# Altium PCB Y9A-07-1517.PcbDoc
Units mil, origin at the board's own origin, x right, y up, seen from the top; angles counter-clockwise.
Board outline 6000 x 4000 mil, 2 copper layers (Top Layer, Bottom Layer); 34 components, 26 nets, 109 pads, 0 vias.
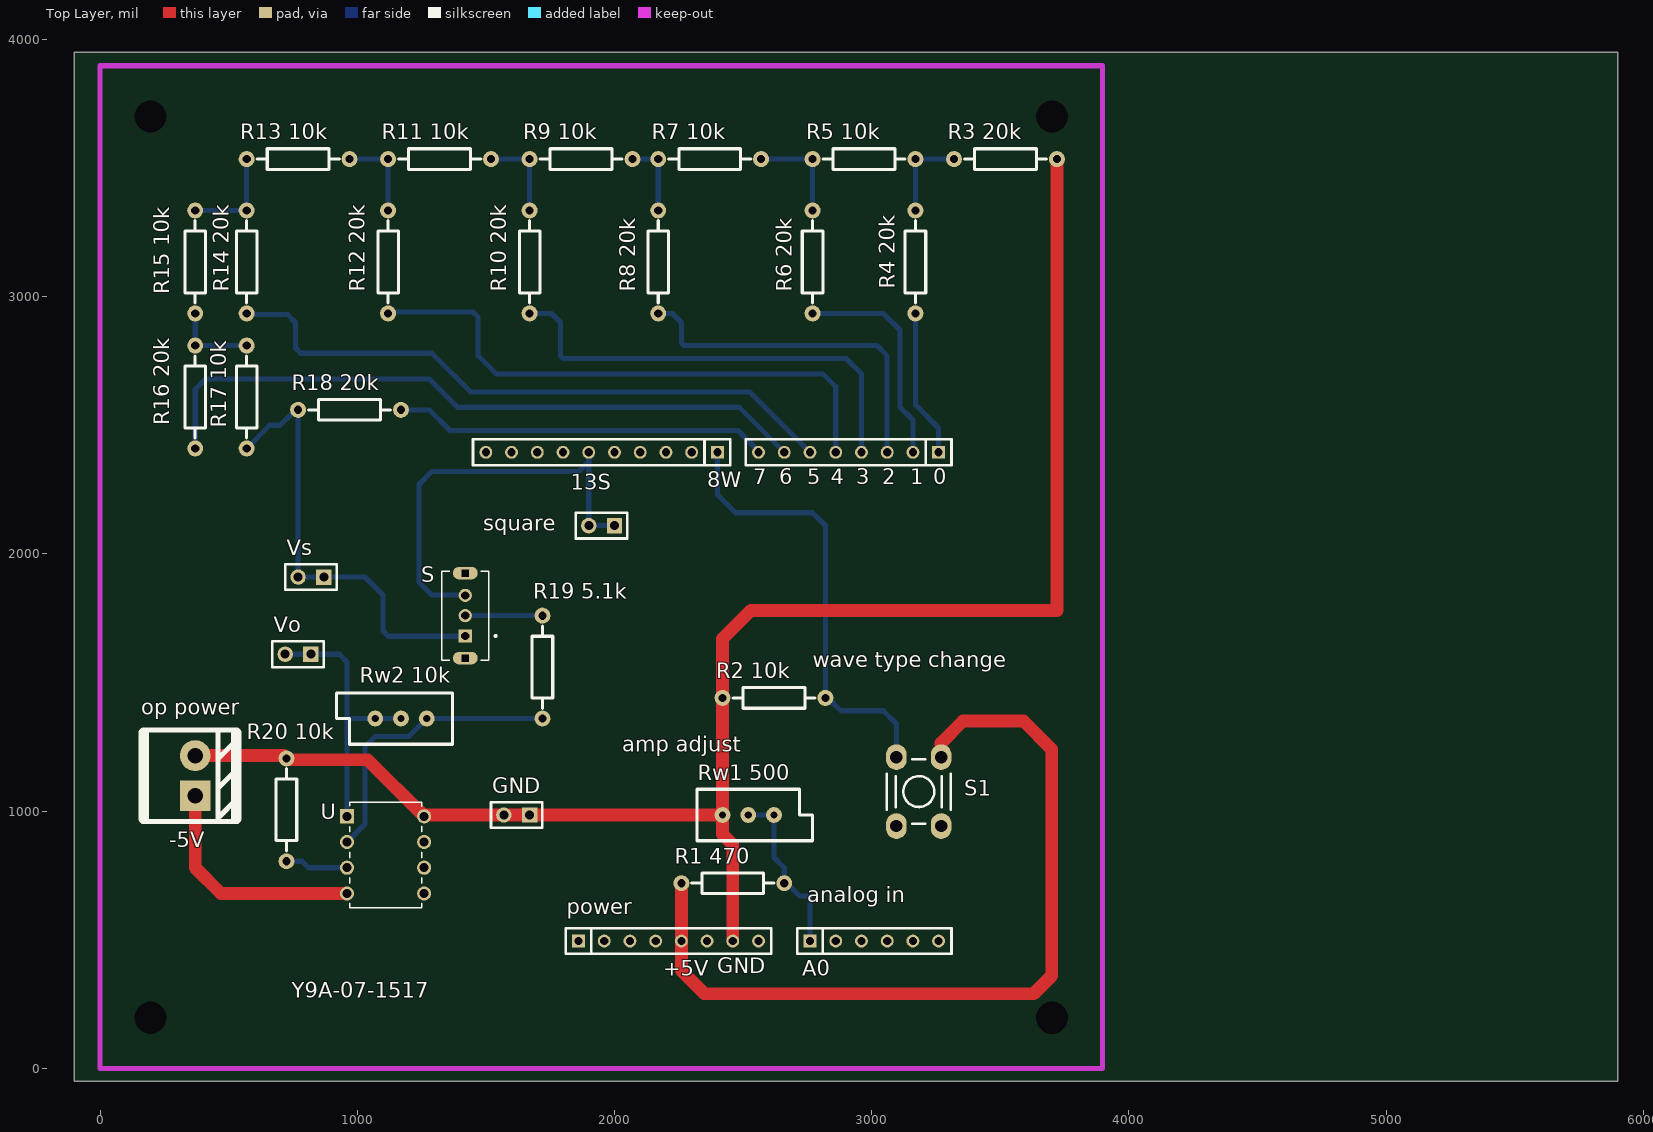
[diagram p0: Top Layer view]
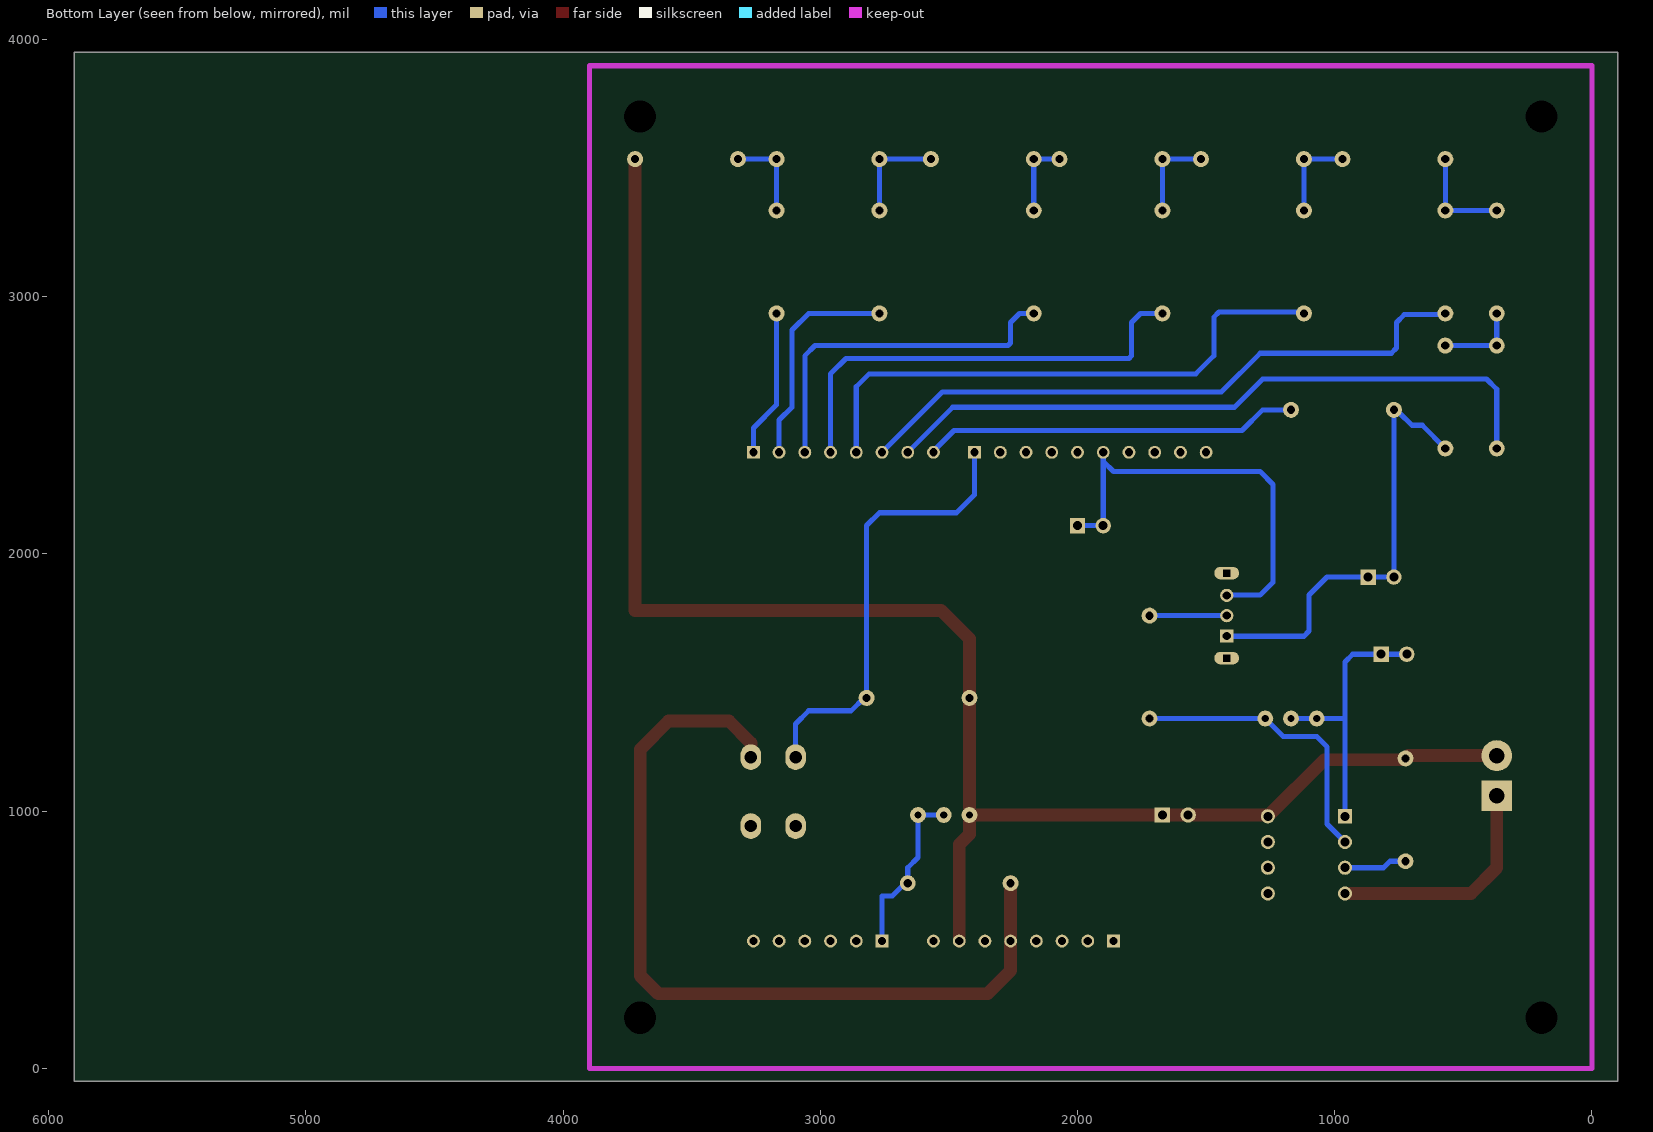
[diagram p1: Bottom Layer view, seen from below]

## Layer stack, top to bottom
Top Layer: signal copper 1.4
Dielectric: dielectric 12.6, FR-4, Dk 4.8
Bottom Layer: signal copper 1.4

## Board outline
-100,-50 5900,-50 5900,3950 -100,3950

## Design rules (kind name [scope] priority, off if disabled: settings)
Clearance [All] p1 off: gap=10
DiffPairsRouting [All] p1 off: maxlimit=10 minlimit=10 mostfreqgap=10 maxuncoupledlength=500
FanoutControl Fanout_BGA [IsBGA] p1 off: bgadir=Out bgaviamode=Centered fanoutstyle=Auto fanoutdirection=Alternating viagrid=1 // Fanout_BGA (Default Rule)
FanoutControl Fanout_LCC [IsLCC] p2 off: bgadir=Out bgaviamode=Centered fanoutstyle=Auto fanoutdirection=Alternating viagrid=1 // Fanout_LCC (Default Rule)
FanoutControl Fanout_SOIC [IsSOIC] p3 off: bgadir=Out bgaviamode=Centered fanoutstyle=Auto fanoutdirection=Alternating viagrid=1 // Fanout_SOIC (Default Rule)
FanoutControl Fanout_Small [(CompPinCount < 5)] p4 off: bgadir=Out bgaviamode=Centered fanoutstyle=Auto fanoutdirection=OutThenIn viagrid=1 // Fanout_Small (Default Rule)
FanoutControl Fanout_Default [All] p5 off: bgadir=Out bgaviamode=Centered fanoutstyle=Auto fanoutdirection=Alternating viagrid=1 // Fanout_Default (Default Rule)
HoleSize [All] p1 off: absolutevalues=TRUE maxlimit=100 minlimit=1 maxpercent=80.000 minpercent=20.000
HoleToHoleClearance [All] p1 off: gap=10 allowstackedmicrovias=TRUE
LayerPairs [All] p1 off: enforce=TRUE
MinimumSolderMaskSliver [All] p1 off: minsoldermaskwidth=10
NetAntennae [All] p1 off: netantennaetolerance=0
PolygonConnect [All] p1: connectstyle=Relief reliefconductorwidth=10 reliefentries=4 polygonreliefangle="90 Angle"
RoutingCorners [All] p1 off: cornerstyle=45-Degree minsetback=100 maxsetback=100
RoutingLayers [All] p1 off: top layer_v5=TRUE bottom layer_v5=TRUE
RoutingPriority [All] p1 off: routingpriority=0
RoutingTopology [All] p1 off: topology=Shortest
RoutingVias [All] p1 off: holewidth=28 width=50 viastyle="Through Hole" minholewidth=28 minwidth=50 maxholewidth=28 maxwidth=50
ShortCircuit [All] p1 off: allowed=FALSE
SilkToSilkClearance [All] p1 off: silktosilkclearance=10
SilkscreenOverComponentPads [All] p1 off: minsilkscreentomaskgap=10
SolderMaskExpansion [All] p1: expansion=4
TestPointUsage [All] p1 off: valid=0 allowmultiple=FALSE
Testpoint [All] p1 off: side=15 testpointundercomponent=TRUE minsize=40 maxsize=100 preferedsize=60 minholesize=0 maxholesize=40 preferedholesize=32 testpointgrid=1 style=1023 order=0123456789
UnRoutedNet [All] p1 off:
Width [All] p1: maxlimit=50 minlimit=10 preferedwidth=20 toplayer_prefwidth=50 minimp=50.000000 maximp=50.000000 favimp=50.000000
5 further rules are at their usual default settings.

## Classes and differential pairs
component class signal_generator: "analog in" "R1 470" "R2 10k"

## Components (designator, comment, footprint, x,y, rotation, side; value= is the part's Value field where it differs from the comment)
"analog in" "HEADER 6" SIP6 2760,495 r0 top
"digital in part 1" "8 HEADER" SIP8 3260,2395 r180 top
"digital in part 2" "HEADER 10" SIP10 2400,2395 r180 top
GND "HEADER 2" SIP-2 1670,985 r180 top
"op power" "HEADER 2" "POWER PLUG2" 370,1060 r270 top
power "8 HEADER" SIP8 1860,495 r0 top
"R1 470" "470" AXIAL-0.4 2660,720 r180 top (schematic designator R1)
"R2 10k" "1k" AXIAL-0.4 2420,1440 r0 top (schematic designator R2)
"R3 20k" "20k" AXIAL-0.4 3720,3535 r180 top (schematic designator R3)
"R4 20k" "20k" AXIAL-0.4 3170,2935 r90 top (schematic designator R4)
"R5 10k" "10k" AXIAL-0.4 3170,3535 r180 top (schematic designator R5)
"R6 20k" "20k" AXIAL-0.4 2770,2935 r90 top (schematic designator R6)
"R7 10k" "10k" AXIAL-0.4 2570,3535 r180 top (schematic designator R7)
"R8 20k" "20k" AXIAL-0.4 2170,2935 r90 top (schematic designator R8)
"R9 10k" "10k" AXIAL-0.4 2070,3535 r180 top (schematic designator R9)
"R10 20k" "20k" AXIAL-0.4 1670,2935 r90 top (schematic designator R10)
"R11 10k" "10k" AXIAL-0.4 1520,3535 r180 top (schematic designator R11)
"R12 20k" "20k" AXIAL-0.4 1120,2935 r90 top (schematic designator R12)
"R13 10k" "10k" AXIAL-0.4 970,3535 r180 top (schematic designator R13)
"R14 20k" "20k" AXIAL-0.4 570,2935 r90 top (schematic designator R14)
"R15 10k" "10k" AXIAL-0.4 370,3335 r270 top (schematic designator R15)
"R16 20k" "20k" AXIAL-0.4 370,2410 r90 top (schematic designator R16)
"R17 10k" "10k" AXIAL-0.4 570,2810 r270 top (schematic designator R17)
"R18 20k" "20k" AXIAL-0.4 1170,2560 r180 top (schematic designator R18)
"R19 5.1k" "5.1k" AXIAL-0.4 1720,1760 r270 top (schematic designator R19)
"R20 10k" "10k" AXIAL-0.4 724.87,1205.13 r270 top (schematic designator R20)
"Rw1 500" "500" VR5 2420,985 r0 top (schematic designator Rw1)
"Rw2 10k" "10k" VR5 1270,1360 r180 top (schematic designator Rw2)
S "SS12D07VG4" SW_SS12D07VG4 1420,1760 r90 top
S1 "SW-PB4" AN-S 3270,1210 r270 top
square "HEADER 2" SIP-2 2000,2110 r180 top
U "LT1490CN8#PBF" PDIP-8_N 1260,680 r0 top
Vo "HEADER 2" SIP-2 820,1610 r180 top
Vs "HEADER 2" SIP-2 870,1910 r180 top

## Footprints (in the part's own frame and the unit in brackets; to place one, negate y for a bottom-side part, rotate by r counter-clockwise, add the part's x,y. Pads: shape width x height; smd on the part's side, far side on the other; paste and mask are expansions set on the pad)
AN-S [mil] "小按钮开关"
  oval 100x80 hole 48: 1(0,0) 1(268,0) 2(0,-174) 2(268,-174)
  silkscreen extent 9,-212 259,38
AXIAL-0.4 [mil]
  round 62 hole 32: 1(0,0) 2(400,0)
  silkscreen extent 40,-40 360,40
PDIP-8_N [mil]
  rect 55x55 / inner round 55 / far side rect 55x55 hole 35 mask+4.02: 1(-300,300)
  round 55 hole 35 mask+4.02: 2(-300,200) 3(-300,100) 4(-300,0) 5(0,0) 6(0,100) 7(0,200) 8(0,300)
  silkscreen extent -290,-55 -10,355, body extent -164,-200 164,200, height 155
"POWER PLUG2" [mil] "单电源插座"
  rect 120x120 hole 60: 1(0,0)
  round 120 hole 60: 2(-156,0)
  silkscreen extent -255,-204 100,164
SIP6 [mil]
  rect 50x50 hole 32: 1(0,0)
  round 50 hole 32: 2(100,0) 3(200,0) 4(300,0) 5(400,0) 6(500,0)
  silkscreen extent -50,-50 550,50
SIP8 [mil]
  rect 50x50 hole 32: 1(0,0)
  round 50 hole 32: 2(100,0) 3(200,0) 4(300,0) 5(400,0) 6(500,0) 7(600,0) 8(700,0)
  silkscreen extent -50,-50 750,50
SIP10 [mil]
  rect 50x50 hole 32: 1(0,0)
  round 50 hole 32: 2(100,0) 3(200,0) 4(300,0) 5(400,0) 6(500,0) 7(600,0) 8(700,0) 9(800,0) 10(900,0)
  silkscreen extent -50,-50 950,50
SIP-2 [mil]
  rect 60x60 hole 35: 1(0,0)
  round 60 hole 35: 2(100,0)
  silkscreen extent -50,-50 150,50
SW_SS12D07VG4 [mm]
  rect 1.308x1.308 / inner round 1.308 / far side rect 1.308x1.308 hole 0.8: 1(-2,0)
  round 1.308 hole 0.8: 2(0,0) 3(2,0)
  oval 1.23x2.46 hole 0.7 square: S1(-4.2,0) S2(4.2,0)
  silkscreen extent -4.4,-3.1 4.4,2.3, body extent -4.35,-2.2 4.35,2.2, height 8.7
VR5 [mil]
  round 62 hole 28: 1(0,0) 2(200,0) 3(100,0)
  silkscreen extent -100,-100 350,100

## Part data
"digital in part 1" power: library part "HEADER 8", "8 Pin Header"
"R1 470" "R2 10k" "R3 20k" "R4 20k" "R5 10k" "R6 20k" "R7 10k" "R8 20k" "R9 10k" "R10 20k" "R11 10k" "R12 20k" "R13 10k" "R14 20k" "R15 10k" "R16 20k" "R17 10k" "R18 20k" "R19 5.1k" "R20 10k": library part RES2
"Rw1 500" "Rw2 10k": library part POT1, "Potentiometer"
S: "Switch Slide ON ON SPDT Top Slide 0.3A 30VDC PC Pins Bracket Mount/Through Hole Automotive Bulk"
S1: "微动开关"
U: "Standard (General Purpose) Amplifier 2 Circuit Rail-to-Rail 8-PDIP"

## Free pads (board coordinates)
  round 60 hole 125: 1(196.85,3700.79) 2(3700.79,3700.79) 3(3700.79,196.85) 4(196.85,196.85)

## Nets (pads, with @x,y where several pads share a name; then routed paths per layer and width w, separated by ;. In a path a pad name is that pad's centre, name@x,y a point inside that pad or via, vN(x,y) a via of type N, cw(c..) or ccw(c..) an arc to the next point about the centre after c; other vN are vias at no path point)
-5V: "op power.1" U.4 | length 911.4
  Top Layer w50: 370,1060 370,780 470,680 U.4
AMP: "analog in.1" "R1 470.1" "Rw1 500.2" "Rw1 500.3" | length 671.4
  Bottom Layer w20: 2520,985 2620,985 2620,820 2660,780 2660,730 2720,670 2760,670 2760,495
D0: "digital in part 1.1" "R4 20k.1" | length 577.3
  Bottom Layer w20: 3170,2935 3170,2580 3260,2490 3260,2395
D1: "digital in part 1.2" "R6 20k.1" | length 862.6
  Bottom Layer w20: 2770,2935 3045,2935 3110,2870 3110,2570 3160,2520 3160,2395
D2: "digital in part 1.3" "R8 20k.1" | length 1380.2
  Bottom Layer w20: 2170,2935 2225,2935 2260,2900 2260,2820 2270,2810 3020,2810 3060,2770 3060,2395
D3: "digital in part 1.4" "R10 20k.1" | length 1768.5
  Bottom Layer w20: 1670,2935 1755,2935 1790,2900 1790,2770 1800,2760 2900,2760 2960,2700 2960,2395
D4: "digital in part 1.5" "R12 20k.1" | length 2198
  Bottom Layer w20: 1125,2940 1450,2940 1470,2920 1470,2770 1540,2700 2810,2700 2860,2650 2860,2395
D5: "digital in part 1.6" "R14 20k.1" | length 2465.2
  Bottom Layer w20: 575,2930 730,2930 760,2900 760,2800 780,2780 1290,2780 1440,2630 2525,2630 2760,2395
D6: "digital in part 1.7" "R16 20k.1" | length 2654.6
  Bottom Layer w20: 370,2410 370,2640 410,2680 1280,2680 1390,2570 2485,2570 2660,2395
D7: "digital in part 1.8" "R18 20k.1" | length 1456.3
  Bottom Layer w20: 1170,2560 1280,2560 1360,2480 2480,2480 2560,2400
GND: "op power.2" "R2 10k.1" "R3 20k.1" "R20 10k.1" "Rw1 500.1" GND.1 GND.2 power.7 U.8 | length 6434.9
  Top Layer w50: 370,1216 714,1216 730,1200 1040,1200 U.8 ; U.8@1265,985 GND.2 GND.1 2420,985 ; power.7 2460,870 2420,910 2420,985 ; 3720,3535 3720,1780 2530,1780 2420,1670 2420,1460 2420,985
NetR3_2: "R3 20k.2" "R4 20k.2" "R5 10k.1" | length 350
  Bottom Layer w20: 3170,3335 3170,3535 3320,3535
NetR5_2: "R5 10k.2" "R6 20k.2" "R7 10k.1" | length 400
  Bottom Layer w20: 2570,3535 2770,3535 2770,3335
NetR7_2: "R7 10k.2" "R8 20k.2" "R9 10k.1" | length 300
  Bottom Layer w20: 2070,3535 2170,3535 2170,3335
NetR9_2: "R9 10k.2" "R10 20k.2" "R11 10k.1" | length 350
  Bottom Layer w20: 1520,3535 1670,3535 1670,3335
NetR11_2: "R11 10k.2" "R12 20k.2" "R13 10k.1" | length 350
  Bottom Layer w20: 970,3535 1120,3535 1120,3335
NetR13_2: "R13 10k.2" "R14 20k.2" "R15 10k.1" | length 400
  Bottom Layer w20: 370,3335 570,3335 570,3535
NetR15_2: "R15 10k.2" "R16 20k.2" "R17 10k.1" | length 325
  Bottom Layer w20: 370,2935 370,2810 570,2810
NetR19_1: "R19 5.1k.1" S.2 | length 300
  Bottom Layer w20: S.2 1720,1760
NetR19_2: "R19 5.1k.2" "Rw2 10k.1" U.2 | length 1134.6
  Bottom Layer w20: U.2 1030,950 1030,1250 1070,1290 1200,1290 1270,1360 1720,1360
NetR20_2: "R20 10k.2" U.3 | length 245.5
  Bottom Layer w20: 724.87,805.13 784.87,805.13 810,780 U.3
SQUARE: "digital in part 2.6" S.3 square.1 square.2 | length 1661.7
  Bottom Layer w20: S.3@1418.74,1840 1290,1840 1240,1890 1240,2270 1290,2320 1860,2320 1900,2360 ; 1900,2395 1900,2360 ; square.1 square.2 1900,2360
VCC: "R1 470.2" power.5 S1.1@3270,1210 | length 3297
  Top Layer w50: 2260,725 power.5 2260,380 2350,290 3630,290 3700,360 3700,1240 3590,1350 3355,1350 3270,1265 S1.1@3270,1210
VO: "Rw2 10k.2" "Rw2 10k.3" U.1 Vo.1 Vo.2 | length 1062.4
  Bottom Layer w20: Vo.2 Vo.1 930,1610 960,1580 960,1360 ; U.1 960,1360 ; 1170,1360 1070,1360 960,1360
VS: "R17 10k.2" "R18 20k.2" S.1 Vs.1 Vs.2 | length 1696.5
  Bottom Layer w20: 570,2410 660,2500 700,2500 750,2550 ; 770,2550 Vs.2 Vs.1 1030,1910 1100,1840 1100,1700 1120,1680 S.1@1411.26,1680
WAVETYPE: "digital in part 2.1" "R2 10k.2" S1.2@3096,1210 | length 1751.5
  Bottom Layer w20: 2400,2395 2400,2230 2470,2160 2770,2160 2820,2110 2820,1440 2830,1440 2880,1390 3045,1390 3096,1339 S1.2@3096,1210
pads on no net: "analog in.2" "analog in.3" "analog in.4" "analog in.5" "analog in.6" "digital in part 2.2" "digital in part 2.3" "digital in part 2.4" "digital in part 2.5" "digital in part 2.7" "digital in part 2.8" "digital in part 2.9" "digital in part 2.10" power.1 power.2 power.3 power.4 power.6 power.8 S1.1@3270,942 S1.2@3096,942 S.S1 S.S2 U.5 U.6 U.7

## Keep-outs
Keep-Out Layer:
  lines w20: 0,0 3897.64,0 3897.64,3897.64 0,3897.64 0,0

## Silkscreen, mask and mechanical layers (free items; w line width, h text height)
Top Overlay:
  text "7" at 2540,2270 h60
  text "6" at 2640,2270 h60
  text "5" at 2750,2270 h60
  text "4" at 2840,2270 h60
  text "3" at 2940,2270 h60
  text "2" at 3040,2270 h60
  text "1" at 3150,2270 h60
  text "0" at 3240,2270 h60
  text "8W" at 2360,2260 h60
  text "13S" at 1830,2250 h60
  text "wave type change" at 2770,1560 h60
  text "amp adjust" at 2030,1230 h60
  text "-5V" at 270,860 h60
  text "GND" at 2400,370 h60
  text "+5V" at 2190,360 h60
  text "A0" at 2730,360 h60
  text "Y9A-07-1517" at 745,275 h60

## Text inside footprints (layer, text, board x,y; h text height)
U: Mechanical 13 "*" at 962,955 h50